# Altium PCB PAY-IF_R100.PcbDoc (part 5 of 5)
Units mm, origin at the board's own origin, x right, y up, seen from the top; angles counter-clockwise.
Board outline 93 x 90 mm, 6 copper layers (Top Layer, L2_GND, L3_PWR, L4_SIG, L5_GND, Bottom Layer), stack 1.598 mm thick; 271 components, 237 nets, 1362 pads, 661 vias.
Unrouted connection lines stored in the file: 5.
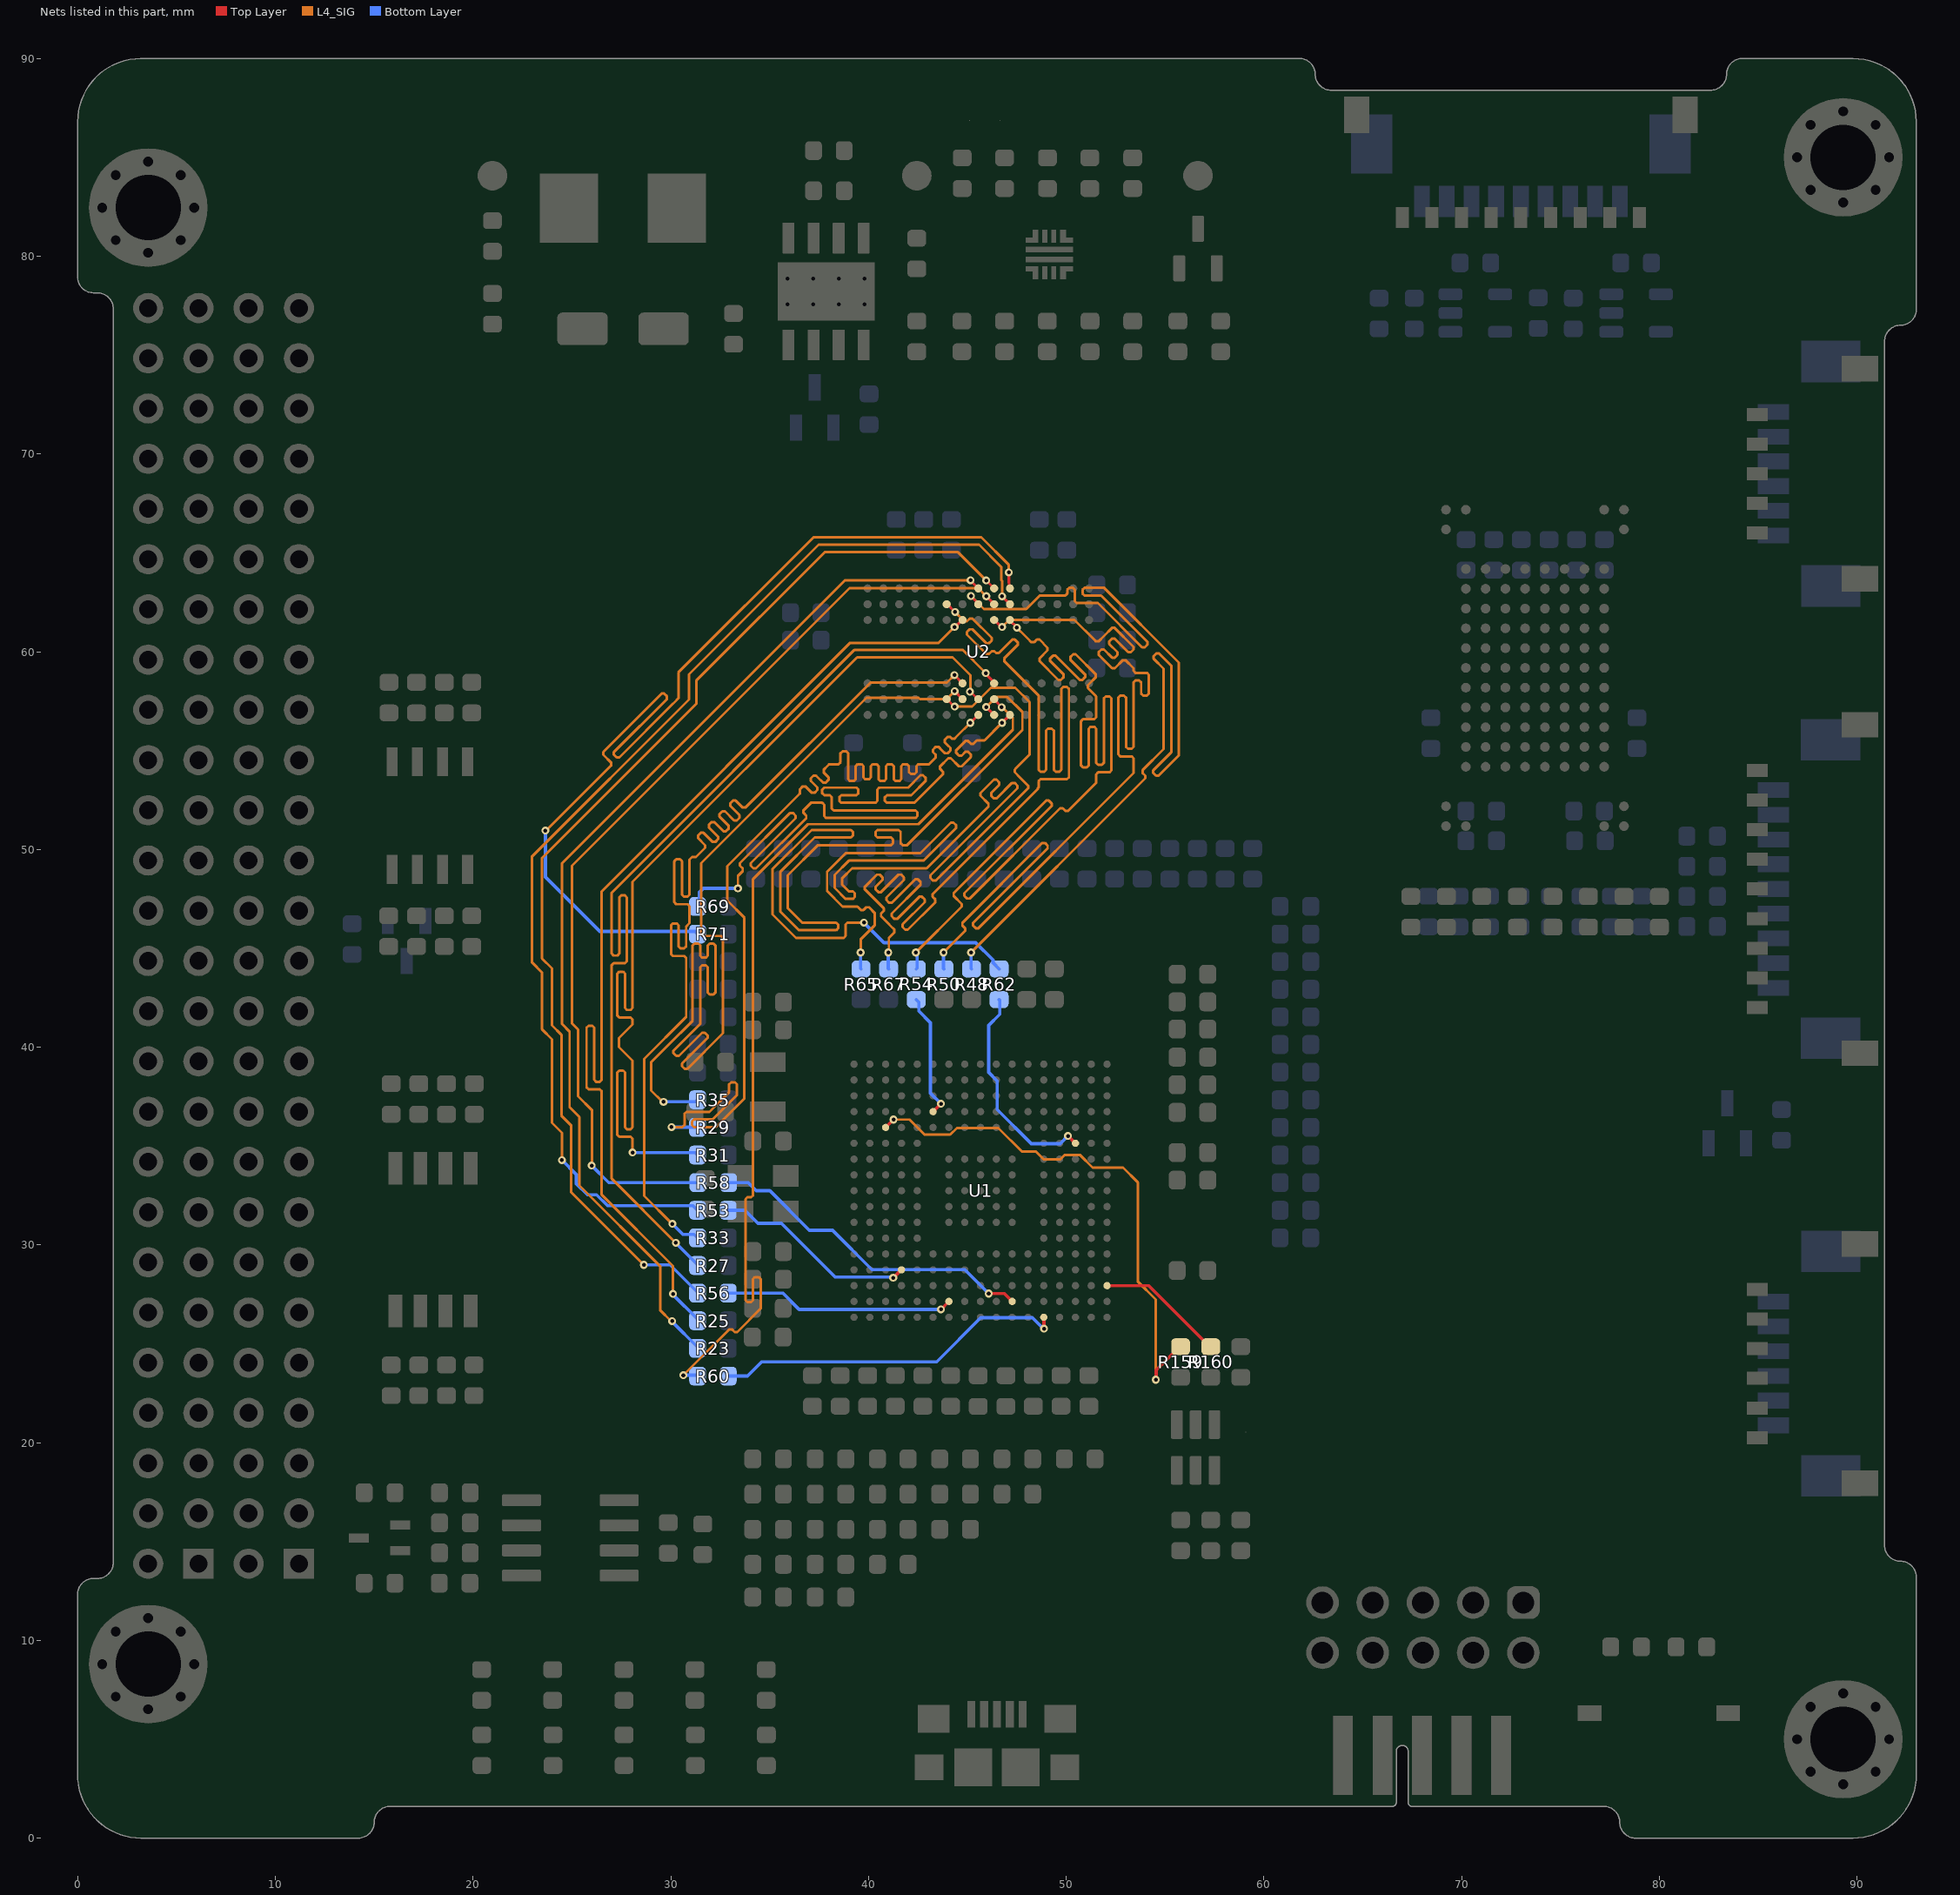
[diagram p9: the nets of this part, all layers, seen from the top]

## Via types
v1: diameter 0.4, hole 0.2, Top Layer to Bottom Layer, tented both sides, 661 vias

## Nets (pads, with @x,y where several pads share a name; then routed paths per layer and width w, separated by ;. In a path a pad name is that pad's centre, name@x,y a point inside that pad or via, vN(x,y) a via of type N, cw(c..) or ccw(c..) an arc to the next point about the centre after c; other vN are vias at no path point) (continued)
SDRAM_R_A5: R35.2 U2.G2 | length 56.7
  Top Layer w0.14: v1(44.357,58.002) U2.G2@44.757,57.601
  L4_SIG w0.13: v1(29.637,37.238) 29.577,37.238 29.014,37.8 29.014,39.245 29.645,39.876 29.759,39.99 29.827,40.058 31.106,41.337 31.106,45.147 31.202,45.243 31.394,45.243 31.49,45.147 31.49,44.62 31.586,44.524 31.778,44.524 31.874,44.62 31.874,45.144 31.97,45.24 32.162,45.24 32.258,45.144 32.258,42.759 32.162,42.663 31.97,42.663 31.874,42.759 31.874,44.044 31.778,44.14 31.586,44.14 31.49,44.044 31.49,41.178 30.14,39.828 30.14,39.692 30.276,39.556 30.411,39.556 31.588,40.733 31.724,40.733 31.86,40.597 31.86,40.461 30.573,39.175 30.573,39.039 30.709,38.904 30.845,38.904 32.642,40.701 32.642,45.528 32.546,45.624 31.638,45.624 31.542,45.72 31.542,45.785 31.542,49.306 39.9,57.664 42.543,57.664 42.604,57.603 43.958,57.603 v1(44.357,58.002)
  Bottom Layer w0.165: v1(29.637,37.238) 31.256,37.238 R35.2@31.356,37.338
SDRAM_R_A6: R33.2 U2.G3 | length 53.6
  Top Layer w0.14: v1(44.352,58.821) 44.352,58.814 44.757,58.409 U2.G3@44.757,58.401
  L4_SIG w0.13: v1(30.08,31.063) 28.661,32.482 28.661,39.41 30.78,41.529 30.78,44.45 30.78,44.515 30.684,44.611 30.108,44.611 30.012,44.707 30.012,46.163 30.108,46.259 30.3,46.259 30.396,46.163 30.396,45.091 30.492,44.995 30.684,44.995 30.78,45.091 30.78,46.099 30.95,46.27 30.95,47.132 30.854,47.228 30.278,47.228 30.182,47.324 30.182,49.405 30.278,49.501 30.47,49.501 30.566,49.405 30.566,47.708 30.662,47.612 30.854,47.612 30.95,47.708 30.95,49.485 31.081,49.616 31.276,49.616 31.36,49.7 31.694,50.033 31.739,50.079 31.739,50.215 31.386,50.569 31.386,50.705 31.521,50.84 31.657,50.84 32.119,50.379 32.254,50.379 32.39,50.515 32.39,50.651 31.929,51.112 31.929,51.248 32.064,51.383 32.2,51.383 32.662,50.922 32.797,50.922 32.933,51.058 32.933,51.194 32.472,51.655 32.472,51.791 32.608,51.927 32.743,51.927 33.205,51.465 33.34,51.465 33.476,51.601 33.476,51.737 33.015,52.198 33.015,52.334 33.151,52.47 33.286,52.47 33.64,52.116 33.776,52.116 33.993,52.333 40.104,58.444 43.975,58.444 v1(44.352,58.821)
  Bottom Layer w0.165: v1(30.08,31.063) 30.612,30.531 31.178,30.531 R33.2@31.356,30.353
SDRAM_R_A7: R31.2 U2.H2 | length 53.4
  Top Layer w0.14: v1(45.131,57.977) 45.156,57.977 45.531,57.601 U2.H2@45.557,57.601
  L4_SIG w0.13: v1(28.067,34.671) 28.067,35.306 28.067,35.371 27.971,35.467 27.395,35.467 27.299,35.563 27.299,38.722 27.395,38.818 27.587,38.818 27.683,38.722 27.683,35.947 27.779,35.851 27.971,35.851 28.067,35.947 28.067,38.883 28.067,39.314 27.383,39.998 27.383,40.466 28.067,41.151 28.067,41.337 28.067,41.402 27.971,41.498 27.395,41.498 27.299,41.594 27.299,43.722 27.395,43.818 27.587,43.818 27.683,43.722 27.683,41.978 27.779,41.882 27.971,41.882 28.067,41.978 28.067,43.979 28.067,48.357 39.428,59.718 44.252,59.718 45.156,58.814 45.156,58.003 v1(45.131,57.977)
  Bottom Layer w0.165: v1(28.067,34.671) 31.229,34.671 R31.2@31.356,34.544
SDRAM_R_A8: R29.2 U2.H1 | length 52.3
  Top Layer w0.13: v1@45.255,56.501 45.555,56.801 U2.H1@45.557,56.801
  Top Layer w0.164: v1(45.156,56.402) v1@45.255,56.501
  L4_SIG w0.13: v1(30.035,35.958) 30.533,35.958 30.598,35.958 30.694,36.054 30.694,36.63 30.79,36.726 31.957,36.726 32.957,37.726 32.957,38.128 33.053,38.224 33.245,38.224 33.341,38.128 33.341,37.567 32.116,36.342 31.174,36.342 31.078,36.246 31.078,36.054 31.174,35.958 32.275,35.958 33.725,37.408 33.725,38.289 33.725,46.543 32.854,47.414 32.854,49.151 36.444,52.742 36.54,52.837 36.54,52.918 36.54,53.053 36.676,53.189 36.812,53.189 36.852,53.149 37.138,52.863 37.273,52.863 37.409,52.999 37.409,53.135 37.123,53.421 37.083,53.461 37.083,53.596 37.219,53.732 37.355,53.732 37.395,53.692 37.706,53.381 37.842,53.381 37.978,53.516 37.978,53.652 37.734,53.896 37.734,54.032 37.938,54.235 38.013,54.311 38.205,54.311 38.493,54.311 38.589,54.407 38.589,54.866 38.685,54.962 38.877,54.962 38.973,54.866 38.973,54.311 38.973,53.554 39.069,53.458 39.261,53.458 39.357,53.554 39.357,54.215 39.453,54.311 39.645,54.311 39.741,54.215 39.741,53.643 39.837,53.547 40.029,53.547 40.125,53.643 40.125,54.215 40.221,54.311 40.413,54.311 40.509,54.215 40.509,53.554 40.605,53.458 40.797,53.458 40.893,53.554 40.893,54.215 40.989,54.311 41.181,54.311 41.277,54.215 41.277,53.554 41.373,53.458 41.565,53.458 41.661,53.554 41.661,54.215 41.757,54.311 41.949,54.311 42.045,54.215 42.045,53.909 42.141,53.813 42.333,53.813 42.429,53.909 42.429,54.215 42.525,54.311 42.813,54.311 43.064,54.311 43.2,54.446 43.404,54.65 43.404,54.786 43.271,54.919 43.271,55.055 43.406,55.191 43.542,55.191 43.743,54.99 43.869,54.864 44.005,54.864 44.141,54.999 44.141,55.135 44.015,55.261 43.863,55.413 43.863,55.549 43.999,55.684 44.134,55.684 44.218,55.6 44.354,55.6 44.482,55.728 v1(45.156,56.402)
  Bottom Layer w0.165: v1(30.035,35.958) 31.339,35.958 R29.2@31.356,35.941
SDRAM_R_A9: R27.2 U2.J3 | length 53.1
  Top Layer w0.14: v1(45.934,58.921) 45.934,58.873 46.357,58.45 U2.J3@46.357,58.401
  L4_SIG w0.13: v1(30.255,30.107) 27.013,33.349 27.013,44.087 27.013,44.152 27.109,44.248 27.685,44.248 27.781,44.344 27.781,47.576 27.685,47.672 27.493,47.672 27.397,47.576 27.397,44.728 27.301,44.632 27.109,44.632 27.013,44.728 27.013,47.737 27.013,47.813 39.298,60.098 44.756,60.098 v1(45.934,58.921)
  Bottom Layer w0.165: v1(30.255,30.107) 31.356,29.006 R27.2@31.356,28.956
SDRAM_R_A10: R25.2 U2.G7 | length 54.5
  Top Layer w0.14: v1(44.356,61.25) 44.38,61.25 44.732,61.601 U2.G7@44.757,61.601
  L4_SIG w0.13: v1(30.115,27.52) 30.115,28.932 26.509,32.537 26.509,37.706 26.509,37.771 26.413,37.867 25.837,37.867 25.741,37.963 25.741,40.99 25.837,41.086 26.029,41.086 26.125,40.99 26.125,38.347 26.221,38.251 26.413,38.251 26.509,38.347 26.509,41.151 26.509,47.884 39.072,60.447 43.553,60.447 v1(44.356,61.25)
  Bottom Layer w0.165: v1(30.115,27.52) 30.115,27.487 31.356,26.245 R25.2@31.356,26.162
SDRAM_R_A11: R23.2 U2.H9 | length 54.6
  Top Layer w0.14: v1@45.258,63.5 U2.H9@45.557,63.201 ; U2.H9@45.552,63.197 U2.H9@45.552,63.201
  Top Layer w0.164: v1(45.166,63.613) 45.166,63.592 v1@45.258,63.5
  L4_SIG w0.13: v1(30.068,26.144) 30.019,26.144 29.464,26.699 29.464,28.923 25.382,33.005 25.382,36.465 24.883,36.964 24.883,40.785 24.494,41.175 24.494,49.297 38.8,63.603 45.156,63.603 v1(45.166,63.613)
  Bottom Layer w0.165: v1(30.068,26.144) 30.068,26.124 31.356,24.835 R23.2@31.356,24.765
SDRAM_R_BA0: R50.2 U2.J7 | length 55.4
  Top Layer w0.14: U2.J7@46.357,61.601 46.381,61.601 46.732,61.25 v1(46.756,61.25)
  L4_SIG w0.13: v1(43.795,44.788) 44.841,45.834 44.887,45.88 44.887,46.016 44.752,46.152 44.752,46.288 48.791,50.327 48.926,50.327 49.062,50.191 49.062,50.055 45.295,46.288 45.295,46.152 45.431,46.016 45.566,46.016 53.408,53.858 53.408,54.612 53.312,54.708 52.736,54.708 52.64,54.804 52.64,57.684 52.736,57.78 52.928,57.78 53.024,57.684 53.024,55.188 53.12,55.092 53.312,55.092 53.408,55.188 53.408,58.452 53.504,58.548 53.696,58.548 53.792,58.452 53.792,57.876 53.888,57.78 54.08,57.78 54.176,57.876 54.176,58.836 54.08,58.932 53.504,58.932 53.408,59.028 53.408,59.161 53.002,59.567 52.866,59.567 52.459,59.16 52.323,59.16 51.639,59.844 51.639,59.98 51.775,60.116 51.91,60.116 52.323,59.703 52.459,59.703 52.595,59.839 52.595,59.974 52.182,60.387 52.182,60.523 52.318,60.659 52.453,60.659 53.138,59.974 53.274,59.974 53.409,60.11 53.409,60.246 52.453,61.202 52.318,61.202 51.91,60.795 51.639,60.523 51.503,60.523 51.457,60.569 50.415,61.611 47.118,61.611 v1(46.756,61.25)
  Bottom Layer w0.165: v1(43.795,44.788) 43.795,43.975 R50.2@43.815,43.955
SDRAM_R_BA1: R48.2 U2.H8 | length 56.7
  Top Layer w0.14: v1(45.183,62.817) 45.183,62.796 45.557,62.423 U2.H8@45.557,62.401
  L4_SIG w0.13: v1(45.183,62.817) 45.187,62.817 45.845,62.159 47.982,62.159 48.667,62.844 49.897,62.844 49.962,62.844 50.058,62.94 50.058,63.132 50.154,63.228 50.346,63.228 50.442,63.132 50.442,62.556 50.538,62.46 51.607,62.46 53.842,60.225 53.978,60.225 54.114,60.361 54.114,60.496 51.766,62.844 50.922,62.844 50.826,62.94 50.826,63.132 50.922,63.228 51.926,63.228 55.697,59.457 55.697,54.75 54.678,53.732 54.543,53.732 54.407,53.868 54.407,54.004 55.313,54.909 55.313,59.298 54.699,59.911 54.563,59.911 54.427,59.776 54.427,59.64 54.929,59.139 54.929,55.068 53.864,54.004 53.864,53.868 54,53.732 54,53.596 53.954,53.55 v1@45.193,44.79
  Bottom Layer w0.165: v1(45.191,44.788) 45.191,43.976 R48.2@45.212,43.955
SDRAM_R_NBL0: R71.2 U2.K9 | length 52.6
  Top Layer w0.14: 47.11,63.5 47.11,63.248 U2.K9@47.157,63.201
  Top Layer w0.165: v1(47.101,64.014) 47.109,64.006 47.109,63.566 ; 47.11,63.5 47.11,63.565
  L4_SIG w0.13: v1(23.66,50.953) 23.696,50.953 26.945,54.202 26.991,54.248 26.991,54.384 26.584,54.791 26.584,54.927 29.536,57.879 29.672,57.879 29.808,57.743 29.808,57.608 27.127,54.927 27.127,54.791 27.262,54.655 27.398,54.655 30.079,57.336 30.193,57.45 30.387,57.644 30.387,58.953 37.226,65.792 45.704,65.792 47.088,64.409 47.088,64.027 v1(47.101,64.014)
  Bottom Layer w0.165: v1(23.66,50.953) 23.66,48.603 26.413,45.85 31.226,45.85 R71.2@31.356,45.72
SDRAM_R_NBL1: R69.2 U2.K1 | length 50.9
  Top Layer w0.165: v1(46.756,56.402) U2.K1@47.157,56.801
  L4_SIG w0.128: v1(33.397,48.028) 33.397,48.661 33.593,48.858 33.638,48.903 33.638,49.038 33.503,49.173 33.503,49.308 36.041,51.846 36.176,51.846 36.311,51.711 36.311,51.576 34.044,49.308 34.044,49.173 34.179,49.038 34.314,49.038 36.851,51.576 36.851,51.711 36.716,51.846 36.716,51.981 36.761,52.026 37.093,52.358
  L4_SIG w0.13: 37.093,52.358 37.599,52.358 37.664,52.358 37.76,52.262 37.76,51.686 37.856,51.59 42.383,51.59 42.479,51.686 42.479,51.878 42.383,51.974 38.24,51.974 38.144,52.07 38.144,52.646 38.048,52.742 37.76,52.742 37.664,52.838 37.664,53.03 37.76,53.126 39.393,53.126 39.489,53.03 39.489,52.838 39.393,52.742 38.624,52.742 38.528,52.646 38.528,52.454 38.624,52.358 40.352,52.358 40.448,52.454 40.448,53.03 40.544,53.126 42.007,53.126 42.63,53.749 42.765,53.749 42.901,53.613 42.901,53.477 42.166,52.742 40.928,52.742 40.832,52.646 40.832,52.454 40.928,52.358 42.325,52.358 43.763,53.796 43.763,53.932 43.627,54.067 43.627,54.203 44.034,54.61 44.17,54.61 44.577,54.203 44.713,54.203 45.177,54.667 45.177,54.803 45.041,54.938 44.905,54.938 44.713,54.746 44.577,54.746 44.442,54.882 44.442,55.018 44.905,55.481 45.041,55.481 45.177,55.346 45.313,55.346 45.359,55.392 45.481,55.514 45.868,55.514 v1(46.756,56.402)
  Bottom Layer w0.165: R69.2@31.356,47.117 31.455,47.216 31.455,47.838 31.645,48.028 v1(33.397,48.028)
SDRAM_R_NBL2: R67.2 U2.F8 | length 61.7
  Top Layer w0.14: U2.F8@43.957,62.401 43.973,62.401 44.364,62.01 v1(44.38,62.01)
  L4_SIG w0.13: v1(41.001,44.788) 41.033,44.82 41.033,45.524 41.269,45.759 41.315,45.805 41.315,45.941 41.111,46.145 41.043,46.212 40.636,46.62 40.636,46.755 40.771,46.891 40.771,47.027 39.821,47.977 39.821,48.113 40.432,48.724 40.568,48.724 40.704,48.589 40.704,48.453 40.364,48.113 40.364,47.977 40.5,47.842 40.636,47.842 41.519,48.724 41.654,48.724 41.79,48.589 41.79,48.453 40.907,47.57 40.907,47.434 41.043,47.299 41.179,47.299 42.367,48.487 42.503,48.487 42.639,48.351 42.639,48.215 41.179,46.755 41.179,46.62 41.315,46.484 41.45,46.484 42.571,47.604 42.706,47.604 42.842,47.469 42.842,47.333 41.722,46.212 41.722,46.077 41.858,45.941 41.993,45.941 43.385,47.333 43.385,47.469 43.249,47.604 43.249,47.74 43.295,47.786 48.569,53.06 48.569,53.103 48.604,53.138 48.604,53.389 48.604,53.454 48.7,53.55 50.044,53.55 50.14,53.646 50.14,58.122 50.044,58.218 49.852,58.218 49.756,58.122 49.756,54.03 49.66,53.934 49.468,53.934 49.372,54.03 49.372,56.015 49.276,56.111 49.084,56.111 48.988,56.015 48.988,54.03 48.892,53.934 48.7,53.934 48.604,54.03 48.604,57.786 46.868,59.523 46.868,59.659 47.547,60.337 47.547,60.473 47.411,60.609 47.275,60.609 46.868,60.202 46.596,59.93 46.461,59.93 46.415,59.976 46.369,60.022 46.233,60.022 46.097,59.886 45.961,59.886 44.984,60.863 44.984,60.999 45.12,61.135 45.256,61.135 45.961,60.429 46.097,60.429 46.233,60.565 46.233,60.701 45.256,61.678 45.12,61.678 44.984,61.542 44.849,61.542 44.803,61.588 v1(44.38,62.01)
  Bottom Layer w0.165: v1(41.001,44.788) 41.001,43.975 R67.2@41.021,43.955
SDRAM_R_NBL3: R65.2 U2.F2 | length 62.3
  Top Layer w0.14: U2.F2@43.957,57.601 43.969,57.601 44.345,57.225 v1(44.357,57.225)
  L4_SIG w0.13: v1(39.604,44.788) 39.604,45.45 40.308,46.155 40.308,46.794 40.072,47.03 40.026,47.076 39.891,47.076 39.755,46.94 39.619,46.94 39.445,47.114 38.689,47.114 37.908,47.895 37.908,48.871 38.853,49.815 42.627,49.815 44.169,51.358 44.305,51.358 44.441,51.222 44.441,51.087 42.786,49.431 39.012,49.431 38.292,48.712 38.292,48.054 38.848,47.498 39.214,47.498 39.31,47.594 39.31,47.786 39.214,47.882 39.007,47.882 38.676,48.213 38.676,48.552 39.171,49.047 42.945,49.047 46.07,52.173 46.07,52.308 45.663,52.716 45.663,52.851 46.342,53.53 46.477,53.53 46.613,53.395 46.613,53.259 46.206,52.851 46.206,52.716 46.342,52.58 46.477,52.58 47.262,53.364 47.397,53.364 47.533,53.228 47.533,53.093 43.131,48.691 43.131,48.555 43.267,48.419 43.403,48.419 48.076,53.093 48.076,53.228 47.669,53.636 47.397,53.907 47.397,54.043 47.443,54.089 48.147,54.793 48.147,57.455 47.43,58.173 46.197,58.173 45.249,57.225 v1(44.357,57.225)
  Bottom Layer w0.165: v1(39.604,44.788) 39.604,43.975 R65.2@39.624,43.955
SDRAM_R_SDCKE1: R60.2 U2.J2 | length 49.5
  Top Layer w0.14: U2.J2@46.357,57.601 46.357,57.584 46.735,57.206 v1(46.735,57.189)
  L4_SIG w0.13: v1(30.637,23.408) 32.913,25.684 32.959,25.73 33.095,25.73 33.231,25.595 33.367,25.595 34.547,26.775 34.547,28.277 34.451,28.373 34.259,28.373 34.163,28.277 34.163,27.201 34.067,27.105 33.875,27.105 33.779,27.201 33.779,32.311 33.875,32.407 34.067,32.407 34.163,32.503 34.163,32.568 34.163,48.501 36.939,51.277 42.527,51.277 47.303,56.054 47.303,56.658 46.773,57.189 v1(46.735,57.189)
  Bottom Layer w0.165: v1(30.637,23.408) 31.314,23.408 R60.2@31.358,23.364
SDRAM_R_SDCLK: R62.2 U2.J1 | length 57.3
  Top Layer w0.14: v1(45.956,57.205) 45.956,57.203 U2.J1@46.357,56.801 U2.J1@46.357,56.801
  L4_SIG w0.13: v1(39.772,46.296) 39.007,46.296 38.942,46.296 38.846,46.2 38.846,45.624 38.75,45.528 36.336,45.528 35.152,46.712 35.152,49.011 37.127,50.986 39.114,50.986 39.21,50.89 39.21,50.698 39.114,50.602 37.286,50.602 35.536,48.852 35.536,46.871 36.495,45.912 38.366,45.912 38.462,46.008 38.462,46.2 38.366,46.296 36.654,46.296 35.92,47.03 35.92,48.693 37.445,50.218 41.146,50.218 41.242,50.314 41.242,50.506 41.146,50.602 40.458,50.602 40.362,50.698 40.362,50.89 40.458,50.986 41.53,50.986 41.626,50.89 41.626,50.314 41.722,50.218 41.787,50.218 41.959,50.218 47.786,56.045 47.786,56.952 47.022,57.717 46.468,57.717 v1(45.956,57.205)
  Bottom Layer w0.165: v1(39.772,46.296) 39.772,46.295 40.786,45.281 45.428,45.281 46.298,44.411 46.298,44.266 R62.2@46.609,43.955
SDRAM_R_SDNCAS: R54.2 U2.K7 | length 58.8
  Top Layer w0.14: U2.K7@47.157,61.601 47.157,61.582 47.503,61.236 v1(47.503,61.216)
  L4_SIG w0.13: v1(42.398,44.788) 44.673,47.063 44.719,47.109 44.719,47.244 44.311,47.652 44.311,47.787 48.991,52.467 49.127,52.467 49.263,52.332 49.263,52.196 44.855,47.787 44.855,47.652 44.99,47.516 45.126,47.516 49.535,51.924 49.648,52.038 49.694,52.084 49.83,52.084 49.966,51.948 50.102,51.948 51.521,53.368 51.521,53.802 51.617,53.898 52.193,53.898 52.289,53.994 52.289,57.642 52.193,57.738 52.001,57.738 51.905,57.642 51.905,54.378 51.809,54.282 51.617,54.282 51.521,54.378 51.521,56.106 51.425,56.202 51.233,56.202 51.137,56.106 51.137,54.243 51.041,54.147 50.849,54.147 50.753,54.243 50.753,56.49 50.849,56.586 51.425,56.586 51.521,56.682 51.521,57.741 51.094,58.168 51.094,58.304 51.502,58.711 51.502,58.847 50.483,59.865 50.348,59.865 50.212,59.729 50.212,59.593 50.959,58.847 50.959,58.711 50.823,58.575 50.687,58.575 49.465,59.797 49.329,59.797 49.194,59.661 49.194,59.526 49.872,58.847 49.872,58.711 49.737,58.575 49.601,58.575 48.651,59.526 48.651,59.661 49.058,60.069 49.058,60.204 48.651,60.612 48.515,60.612 48.379,60.476 48.243,60.476 48.04,60.68 47.972,60.747 47.926,60.793 v1(47.503,61.216)
  Bottom Layer w0.165: v1(42.398,44.788) 42.398,44.739 42.465,44.672 42.465,44.002 R54.2@42.418,43.955
SDRAM_R_SDNE1: R58.2 U2.J8 | length 48.8
  Top Layer w0.14: v1(45.961,62.806) 45.961,62.801 46.357,62.406 U2.J8@46.357,62.401
  L4_SIG w0.13: v1(26.001,34.015) 26.009,34.023 26.009,36.823 25.311,37.521 25.311,40.888 25.003,41.197 25.003,49.171 39.039,63.207 45.552,63.207 45.953,62.806 v1(45.961,62.806)
  Bottom Layer w0.165: v1(26.001,34.015) 26.868,33.147 R58.2@31.376,33.147
SDRAM_R_SDNRAS: R56.2 U2.J9 | length 56.8
  Top Layer w0.13: v1@46.058,63.5 U2.J9@46.357,63.201
  Top Layer w0.164: v1(45.957,63.602) v1@46.058,63.5
  L4_SIG w0.13: v1(28.64,28.991) 24.952,32.679 24.952,36.057 24.468,36.542 24.468,40.627 23.99,41.105 23.99,43.979 23.486,44.483 23.486,49.56 31.289,57.363 31.289,58.535 37.785,65.03 38.628,65.03 44.528,65.03 v1(45.957,63.602)
  Bottom Layer w0.165: v1(28.64,28.991) 29.967,28.991 31.356,27.602 R56.2@31.356,27.559
SDRAM_R_SDNWE: R53.2 U2.K8 | length 57.7
  Top Layer w0.14: v1(46.757,62.802) U2.K8@47.157,62.401
  L4_SIG w0.13: v1(24.494,34.29) 24.494,35.669 23.99,36.173 23.99,40.401 23.495,40.897 23.495,43.77 22.987,44.278 22.987,49.65 30.919,57.582 30.919,58.856 37.474,65.411 45.592,65.411 46.711,64.293 46.711,63.633 46.757,63.587 v1(46.757,62.802)
  Bottom Layer w0.165: v1(24.494,34.29) 25.223,33.561 25.223,33.098 25.787,32.534 26.25,32.534 26.804,31.98 31.126,31.98 R53.2@31.356,31.75
SDRAM_SDCKE1: R60.1 U1.U13 | length 18
  Top Layer w0.165: U1.U13@48.869,26.339 48.873,26.335 48.873,25.768 v1(48.878,25.764)
  Bottom Layer w0.165: R60.1@32.908,23.364 33.88,23.364 34.601,24.085 43.449,24.085 45.679,26.315 48.296,26.315 48.846,25.764 v1(48.878,25.764)
SDRAM_SDCLK: R62.1 U1.F15 | length 11
  Top Layer w0.165: v1(50.093,35.51) 50.096,35.51 50.466,35.139 U1.F15@50.469,35.139
  Bottom Layer w0.165: R62.1@46.609,42.405 46.641,42.373 46.641,41.662 46.082,41.104 46.082,38.72 46.513,38.289 46.513,36.842 48.238,35.116 49.698,35.116 50.092,35.51 v1(50.093,35.51)
SDRAM_SDNCAS: R54.1 U1.D6 | length 6.3
  Top Layer w0.165: U1.D6@43.269,36.739 v1(43.669,37.139)
  Bottom Layer w0.165: R54.1@42.418,42.405 42.55,42.273 42.55,41.825 43.135,41.24 43.135,37.673 v1(43.669,37.139)
SDRAM_SDNE1: R58.1 U1.T11 | length 16.8
  Top Layer w0.165: v1(46.081,27.539) 46.869,27.539 U1.T11@47.269,27.139
  Bottom Layer w0.164: 40.172,28.751 41.088,28.751 41.09,28.749 43.82,28.749 43.822,28.751 44.869,28.751
  Bottom Layer w0.165: R58.1@32.926,33.147 33.913,33.147 34.322,32.738 35.009,32.738 37.008,30.739 38.184,30.739 40.172,28.751 ; 44.869,28.751 v1(46.081,27.539)
SDRAM_SDNRAS: R56.1 U1.T7 | length 11.7
  Top Layer w0.165: v1(43.669,26.739) U1.T7@44.069,27.139
  Bottom Layer w0.165: R56.1@32.906,27.559 35.675,27.559 36.495,26.739 v1(43.669,26.739)
SDRAM_SDNWE: R53.1 U1.P4 | length 10.3
  Top Layer w0.165: v1(41.251,28.336) 41.258,28.336 41.662,28.739 U1.P4@41.669,28.739
  Bottom Layer w0.165: R53.1@32.906,31.75 33.746,31.75 34.407,31.089 35.601,31.089 38.316,28.374 41.213,28.374 v1(41.251,28.336)
WAKEUP: R159.2 U1.E3 | length 27.3
  Top Layer w0.165: U1.E3@40.869,35.939 v1(41.269,36.339) ; v1(54.536,23.183) 54.554,23.201 54.554,23.669 55.737,24.852 R159.2@55.787,24.852
  L4_SIG w0.13: v1(41.269,36.339) 42.075,36.339 42.837,35.578 44.133,35.578 44.47,35.915 46.571,35.915 47.765,34.721 48.469,34.721 48.871,34.319 49.693,34.319 49.911,34.537 50.716,34.537 51.34,33.913 52.876,33.913 53.62,33.169 53.62,28.152 54.536,27.236 v1(54.536,23.183)
WD_DONE: R160.2 U1.R17 | length 6.5
  Top Layer w0.165: U1.R17@52.069,27.939 54.169,27.939 57.256,24.852 R160.2@57.311,24.852
pads on no net: H1.02 H1.04 H1.05 H1.06 H1.07 H1.08 H1.09 H1.10 H1.11 H1.12 H1.13 H1.14 H1.15 H1.16 H1.17 H1.18 H1.19 H1.20 H1.21 H1.22 H1.23 H1.24 H1.25 H1.26 H1.27 H1.28 H1.29 H1.30 H1.31 H1.32 H1.33 H1.34 H1.35 H1.36 H1.37 H1.38 H1.39 H1.40 H1.42 H1.44 H1.45 H1.46 H1.47 H1.48 H1.49 H1.50 H1.51 H1.52 H2.01 H2.02 H2.03 H2.04 H2.05 H2.06 H2.07 H2.08 H2.09 H2.10 H2.11 H2.12 H2.13 H2.14 H2.15 H2.16 H2.17 H2.18 H2.19 H2.20 H2.21 H2.22 H2.23 H2.24 H2.25 H2.26 H2.27 H2.28 H2.33 H2.34 H2.35 H2.36 H2.37 H2.38 H2.39 H2.40 H2.41 H2.42 H2.43 H2.44 H2.45 H2.46 H2.49 H2.50 H2.51 H2.52 J1.3 J1B.4 J4.4 J4B.3 J5.1 J5BK.10 J6.4 U1.A5 U1.A8 U1.A9 U1.A10 U1.A11 U1.B5 U1.B7 U1.B8 U1.B10 U1.B11 U1.C3 U1.C5 U1.C7 U1.C8 U1.C9 U1.D1 U1.D2 U1.D3 U1.D7 U1.D8 U1.D9 U1.D10 U1.D11 U1.D14 U1.D15 U1.E1 U1.E4 U1.E5 U1.E10 U1.E15 U1.F4 U1.F16 U1.H1 U1.H2 U1.H3 U1.H15 U1.H16 U1.H17 U1.J14 U1.J15 U1.K14 U1.K16 U1.K17 U1.L2 U1.L14 U1.L16 U1.L17 U1.M4 U1.M14 U1.M16 U1.M17 U1.N2 U1.N3 U1.N6 U1.N13 U1.N14 U1.N15 U1.N17 U1.P2 U1.P3 U1.P5 U1.P6 U1.P11 U1.P12 U1.R1 U1.R2 U1.R5 U1.R6 U1.R12 U1.R15 U1.R16 U1.T3 U1.T5 U1.T6 U1.U4 U1.U5 U1.U6 U1.U7 U2.E3 U2.E7 U2.H3 U2.H7 U2.K2 U2.K3 U3.A1 U3.A2 U3.A9 U3.A10 U3.B1 U3.B10 U3.D2 U3.D3 U3.D4 U3.D5 U3.D6 U3.D7 U3.D8 U3.D9 U3.E2 U3.E3 U3.E4@72.215,63.181 U3.E5 U3.E6 U3.E7 U3.E8 U3.E9 U3.F2@70.215,62.181 U3.F3@71.215,62.181 U3.F4@72.215,62.181 U3.F5@73.215,62.181 U3.F6@74.215,62.181 U3.F7@75.215,62.181 U3.F8@76.215,62.181 U3.F9@77.215,62.181 U3.G2@70.215,61.181 U3.G3@71.215,61.181 U3.G4@72.215,61.181 U3.G5@73.215,61.181 U3.G6@74.215,61.181 U3.G7@75.215,61.181 U3.G8@76.215,61.181 U3.G9@77.215,61.181 U3.H2@70.215,60.181 U3.H3@71.215,60.181 U3.H4 U3.H5 U3.H6 U3.H7 U3.H8@76.215,60.181 U3.H9@77.215,60.181 U3.J2 U3.J3 U3.J4 U3.J5@73.215,59.181 U3.J6 U3.J7 U3.J8 U3.J9 U3.K2@70.215,58.181 U3.K3@71.215,58.181 U3.K4 U3.K5 U3.K6 U3.K7 U3.K8@76.215,58.181 U3.K9@77.215,58.181 U3.L2@70.215,57.181 U3.L3@71.215,57.181 U3.L4@72.215,57.181 U3.L5 U3.L6 U3.L7@75.215,57.181 U3.L8@76.215,57.181 U3.L9@77.215,57.181 U3.M2 U3.M3 U3.M4@72.215,56.181 U3.M5@73.215,56.181 U3.M6 U3.M7@75.215,56.181 U3.M8 U3.M9 U3.N2@70.215,55.181 U3.N3@71.215,55.181 U3.N4 U3.N5 U3.N6 U3.N7 U3.N8@76.215,55.181 U3.N9@77.215,55.181 U3.P2@70.215,54.181 U3.P3@71.215,54.181 U3.P4 U3.P5@73.215,54.181 U3.P6@74.215,54.181 U3.P7 U3.P8@76.215,54.181 U3.P9@77.215,54.181 U3.T1 U3.T10 U3.U1 U3.U2 U3.U9 U3.U10 U10.2 U10.3 U10.5

## Polygon pours and split planes (outlines as drawn)
3V3 on L3_PWR "3V3_L03" (solid, remove dead copper, pour order 33): 3.2,0 cw(c3.2,3.2) 0,3.2 0,12.33 cw(c0.8,12.33) 0.8,13.13 1,13.13 ccw(c1,13.93) 1.8,13.93 1.8,77.35 ccw(c1,77.35) 1,78.15 0.8,78.15 cw(c0.8,78.95) 0,78.95 0,86.8 cw(c3.2,86.8) 3.193,90 3.2,90 89.8,90 89.807,90 cw(c89.8,86.8) 93,86.807 93,77.307 cw(c92.2,77.307) 92.2,76.507 ccw(c92.2,75.707) 91.4,75.707 91.4,14.8 ccw(c92.2,14.8) 92.2,14 cw(c92.2,13.2) 93,13.2 93,3.2 cw(c89.8,3.2) 89.8,0 78.8,0 cw(c78.8,0.8) 78,0.8 ccw(c77.2,0.8) 77.2,1.6 67.5,1.6 cw(c67.5,1.8) 67.3,1.8 67.3,4.387 ccw(c67,4.387) 66.7,4.387 66.7,1.8 cw(c66.5,1.8) 66.5,1.6 51,1.6 15.8,1.6 ccw(c15.8,0.8) 15,0.8 cw(c14.2,0.8) 14.2,0
3V3 on L3_PWR "VDD_MCU_L03" (solid, pour order 24): 33.785,78.15 16.319,78.15 16.319,75.12 30.226,75.12 30.226,42.356 30.226,18.296 33.528,18.296 33.528,10.668 39.646,10.668 39.646,13.008 45.974,13.008 45.974,16.523 54.864,16.523 54.864,36.576 38.876,36.576 38.876,22.352 33.785,22.352
3V3 on L3_PWR "VDDLDO_MCU_L03" (solid, pour order 4): 16.383,81.28 16.382,79.818 36.703,79.818 36.703,39.37 48.514,39.37 50.546,37.338 50.546,25.759 47.752,25.759 47.752,25.002 51.435,25.002 51.435,37.361 53.467,37.361 53.467,37.973 51.435,37.973 49.022,40.386 48.133,41.275 38.1,41.275 38.1,81.28
MCU_VCAP on L3_PWR "VCAP_MCU_L03" (solid, remove dead copper, pour order 23): 43.328,41.275 48.294,41.275 51.608,37.96 53.467,37.973 53.467,37.401 51.435,37.401 51.435,25.002 47.907,25.002 47.907,25.909 47.219,25.909 47.219,24.153 52.51,24.153 52.51,34.73 52.51,36.616 54.864,36.616 54.864,38.862 52.006,38.862 48.45,42.418 43.328,42.418
3V3 on L3_PWR "VDD_SDRAM_L03" (solid, pour order 26): 16.383,82.677 16.383,81.28 38.1,81.28 38.1,54.61 51.562,54.61 51.562,64.643 41.402,64.643 41.402,82.677
3V3 on L3_PWR "VDD_eMMC_L03" (solid, pour order 28): 16.383,84.582 16.383,86.106 57.404,86.106 78.486,65.024 78.486,52.181 69.088,52.181 69.215,52.308 69.215,69.469 54.102,84.582
12V_CONN on L3_PWR "12V_CONN_L03" (solid, pour order 29): 89.154,68.326 89.154,41.275 86.487,41.275 86.487,68.326
GND on Top Layer "GND_L01" (solid, remove dead copper, pour order 38): 3.2,0 cw(c3.2,3.2) 0,3.2 0,12.33 cw(c0.8,12.33) 0.8,13.13 1,13.13 ccw(c1,13.93) 1.8,13.93 1.8,77.35 ccw(c1,77.35) 1,78.15 0.8,78.15 cw(c0.8,78.95) 0,78.95 0,86.8 cw(c3.2,86.8) 3.193,90 3.2,90 89.8,90 89.807,90 cw(c89.8,86.8) 93,86.807 93,77.307 cw(c92.2,77.307) 92.2,76.507 ccw(c92.2,75.707) 91.4,75.707 91.4,14.8 ccw(c92.2,14.8) 92.2,14 cw(c92.2,13.2) 93,13.2 93,3.2 cw(c89.8,3.2) 89.8,0 78.8,0 cw(c78.8,0.8) 78,0.8 ccw(c77.2,0.8) 77.2,1.6 67.5,1.6 cw(c67.5,1.8) 67.3,1.8 67.3,4.387 ccw(c67,4.387) 66.7,4.387 66.7,1.8 cw(c66.5,1.8) 66.5,1.6 51,1.6 15.8,1.6 ccw(c15.8,0.8) 15,0.8 cw(c14.2,0.8) 14.2,0
GND on Top Layer "GND_L01_P006" (solid, pour order 6): 50.092,81.047 50.096,81.453 49.496,81.454 49.496,80.69 49.246,80.69 49.246,82.113 50.191,83.058 52.93,83.058 50.894,81.047
12V_CONN on Top Layer "12V_CONN_L01_P010" (solid, remove dead copper, pour order 10): 45.873,87.884 61.468,87.869 61.468,85.725 88.925,85.725 88.9,65.151 83.818,65.151 83.822,68.348 86.106,68.348 86.106,78.994 82.6,83.01 61.468,83.009 61.468,79.612 47.949,79.688 47.949,80.685 45.873,80.685
12V on Top Layer "12V_EFULSE_L01" (solid, pour order 12): 36.221,79.628 50.597,79.686 50.597,80.486 47.81,80.486 47.825,83.947 45.873,83.947 45.873,87.884 36.221,87.884 36.221,81.788
NetC44_1 on Top Layer "DEBUCK_L01" (solid, remove dead copper, pour order 13): 36.221,87.884 27.912,87.884 27.912,74.742 36.221,74.759
3V3 on Top Layer "3V3_L01_P015" (solid, pour order 15): 27.912,87.884 16.383,87.884 16.383,74.727 27.965,74.727
12V_CONN on Top Layer "12V_CONN_L01_P011" (solid, pour order 11): 84.037,42.799 84.037,41.22 88.519,41.22 88.519,43.688 86.614,43.688 86.614,42.799
3V3 on Top Layer "3V3_L01_P032" (solid, remove dead copper, pour order 32): 47.483,20.269 50.785,20.269 50.785,18.288 49.165,18.288 49.165,16.383 47.483,16.383
3V3 on Top Layer "3V3_L01_P020" (solid, remove dead copper, pour order 20): 41.179,20.269 44.481,20.269 44.481,14.63 42.861,14.63 42.861,12.776 41.179,12.776
3V3 on Top Layer "3V3_L01_P018" (solid, remove dead copper, pour order 18): 34.874,20.269 38.176,20.269 38.176,11.125 34.874,11.125
GND on Bottom Layer "GND_L06" (solid, remove dead copper, pour order 40): 3.2,0 cw(c3.2,3.2) 0,3.2 0,12.33 cw(c0.8,12.33) 0.8,13.13 1,13.13 ccw(c1,13.93) 1.8,13.93 1.8,77.35 ccw(c1,77.35) 1,78.15 0.8,78.15 cw(c0.8,78.95) 0,78.95 0,86.8 cw(c3.2,86.8) 3.193,90 3.2,90 89.8,90 89.807,90 cw(c89.8,86.8) 93,86.807 93,77.307 cw(c92.2,77.307) 92.2,76.507 ccw(c92.2,75.707) 91.4,75.707 91.4,14.8 ccw(c92.2,14.8) 92.2,14 cw(c92.2,13.2) 93,13.2 93,3.2 cw(c89.8,3.2) 89.8,0 78.8,0 cw(c78.8,0.8) 78,0.8 ccw(c77.2,0.8) 77.2,1.6 67.5,1.6 cw(c67.5,1.8) 67.3,1.8 67.3,4.387 ccw(c67,4.387) 66.7,4.387 66.7,1.8 cw(c66.5,1.8) 66.5,1.6 51,1.6 15.8,1.6 ccw(c15.8,0.8) 15,0.8 cw(c14.2,0.8) 14.2,0
3V3 on Bottom Layer "3V3_L06_P022" (solid, pour order 22): 72.773,50.818 72.773,56.894 71.247,58.42 71.247,60.325 76.2,60.325 76.2,58.42 74.676,56.896 74.676,50.818 76.646,50.818 76.646,55.154 77.246,55.753 79.883,55.753 79.883,65.024 67.5,65.024 67.5,55.753 70.231,55.753 70.832,55.152 70.832,50.818
12V_CONN on Bottom Layer "12V_CONN_L06_P031" (solid, pour order 31): 84.328,67.877 88.514,67.877 88.514,65.024 84.328,65.024
12V_CONN on Bottom Layer "12V_CONN_L06_P030" (solid, pour order 30): 84.328,43.749 88.514,43.749 88.514,42.203 84.328,42.203
GND on L5_GND "GND_L05" (solid, remove dead copper, pour order 37): 3.2,0 cw(c3.2,3.2) 0,3.2 0,12.33 cw(c0.8,12.33) 0.8,13.13 1,13.13 ccw(c1,13.93) 1.8,13.93 1.8,77.35 ccw(c1,77.35) 1,78.15 0.8,78.15 cw(c0.8,78.95) 0,78.95 0,86.8 cw(c3.2,86.8) 3.193,90 3.2,90 89.8,90 89.807,90 cw(c89.8,86.8) 93,86.807 93,77.307 cw(c92.2,77.307) 92.2,76.507 ccw(c92.2,75.707) 91.4,75.707 91.4,14.8 ccw(c92.2,14.8) 92.2,14 cw(c92.2,13.2) 93,13.2 93,3.2 cw(c89.8,3.2) 89.8,0 78.8,0 cw(c78.8,0.8) 78,0.8 ccw(c77.2,0.8) 77.2,1.6 67.5,1.6 cw(c67.5,1.8) 67.3,1.8 67.3,4.387 ccw(c67,4.387) 66.7,4.387 66.7,1.8 cw(c66.5,1.8) 66.5,1.6 51,1.6 15.8,1.6 ccw(c15.8,0.8) 15,0.8 cw(c14.2,0.8) 14.2,0
GND on L4_SIG "GND_L04" (solid, remove dead copper, pour order 41): 0,3.2 0,12.33 cw(c0.8,12.33) 0.8,13.13 1,13.13 ccw(c1,13.93) 1.8,13.93 1.8,77.35 ccw(c1,77.35) 1,78.15 0.8,78.15 cw(c0.8,78.95) 0,78.95 0,86.8 cw(c3.2,86.8) 3.193,90 3.2,90 61.8,90 cw(c61.8,89.2) 62.6,89.2 ccw(c63.4,89.2) 63.4,88.4 82.6,88.4 ccw(c82.6,89.2) 83.4,89.2 cw(c84.2,89.2) 84.2,90 89.8,90 89.807,90 cw(c89.8,86.8) 93,86.807 93,77.307 cw(c92.2,77.307) 92.2,76.507 ccw(c92.2,75.707) 91.4,75.707 91.4,14.8 ccw(c92.2,14.8) 92.2,14 cw(c92.2,13.2) 93,13.2 93,3.2 cw(c89.8,3.2) 89.8,0 78.8,0 cw(c78.8,0.8) 78,0.8 ccw(c77.2,0.8) 77.2,1.6 67.5,1.6 cw(c67.5,1.8) 67.3,1.8 67.3,4.387 ccw(c67,4.387) 66.7,4.387 66.7,1.8 cw(c66.5,1.8) 66.5,1.6 51,1.6 15.8,1.6 ccw(c15.8,0.8) 15,0.8 cw(c14.2,0.8) 14.2,0 3.2,0 cw(c3.2,3.2)
GND on L2_GND "GND_L02" (solid, remove dead copper, pour order 42): 3.2,0 cw(c3.2,3.2) 0,3.2 0,12.33 cw(c0.8,12.33) 0.8,13.13 1,13.13 ccw(c1,13.93) 1.8,13.93 1.8,77.35 ccw(c1,77.35) 1,78.15 0.8,78.15 cw(c0.8,78.95) 0,78.95 0,86.8 cw(c3.2,86.8) 3.193,90 3.2,90 89.8,90 89.807,90 cw(c89.8,86.8) 93,86.807 93,77.307 cw(c92.2,77.307) 92.2,76.507 ccw(c92.2,75.707) 91.4,75.707 91.4,14.8 ccw(c92.2,14.8) 92.2,14 cw(c92.2,13.2) 93,13.2 93,3.2 cw(c89.8,3.2) 89.8,0 78.8,0 cw(c78.8,0.8) 78,0.8 ccw(c77.2,0.8) 77.2,1.6 67.5,1.6 cw(c67.5,1.8) 67.3,1.8 67.3,4.387 ccw(c67,4.387) 66.7,4.387 66.7,1.8 cw(c66.5,1.8) 66.5,1.6 51,1.6 15.8,1.6 ccw(c15.8,0.8) 15,0.8 cw(c14.2,0.8) 14.2,0

## Keep-outs
Keep-Out Layer:
  lines w0.1: 1.8,77.35 1.8,13.93 cw(c1,13.93) 1,13.13 0.8,13.13 ccw(c0.8,12.33) 0,12.33 0,3.2 ccw(c3.2,3.2) 3.2,0 14.2,0 ccw(c14.2,0.8) 15,0.8 cw(c15.8,0.8) 15.8,1.6 51,1.6 66.5,1.6 ccw(c66.5,1.8) 66.7,1.8 ; 1.8,77.35 ccw(c1,77.35) 1,78.15 0.8,78.15 cw(c0.8,78.95) 0,78.95 0,86.8 cw(c3.2,86.8) 3.193,90 ; 3.2,90 61.8,90 cw(c61.8,89.2) 62.6,89.2 ccw(c63.4,89.2) 63.4,88.4 82.6,88.4 ccw(c82.6,89.2) 83.4,89.2 cw(c84.2,89.2) 84.2,90 89.8,90 ; 67.3,1.8 ccw(c67.5,1.8) 67.5,1.6 77.2,1.6 cw(c77.2,0.8) 78,0.8 ccw(c78.8,0.8) 78.8,0 89.8,0 ccw(c89.8,3.2) 93,3.2 93,13.2 ccw(c92.2,13.2) 92.2,14 cw(c92.2,14.8) 91.4,14.8 91.4,75.707 cw(c92.2,75.707) 92.2,76.507 ccw(c92.2,77.307) 93,77.307 93,86.807 ccw(c89.8,86.8) 89.807,90

## Other copper
Top Layer:
  pour cut-out: 62.738,2.413 73.279,2.413 73.279,1.6 62.738,1.6
  pour cut-out: 45.466,87.343 46.397,87.343 46.397,86.393 45.467,86.393
  pour cut-out: 49.149,82.016 49.246,82.113 49.25,81.32 49.496,81.32 49.496,81.44 49.596,81.439 49.596,80.596 49.149,80.596
Bottom Layer:
  pour cut-out: 62.738,2.413 73.279,2.413 73.279,1.6 62.738,1.6

## Silkscreen, mask and mechanical layers (free items; w line width, h text height)
Top Overlay:
  drawing of 34 lines, arcs and shapes, not listed
  text "12V_e" at 41.689,86.121 h0.4 r45
  text "12V_IN" at 55.659,86.121 h0.4 r45
  text "3V3" at 20.527,86.073 h0.4 r45
  text "LVDS_RxC_N" at 67.208,76.033 h0.4 r90
  text "LVDS_RxC_P" at 68.75,76.033 h0.4 r90
  text "LVDS_TxC_N" at 70.158,76.033 h0.4 r90
  text "LVDS_TxC_P" at 71.633,76.033 h0.4 r90
  text "GND" at 73.191,75.987 h0.4 r90
  text "LVDS_RxD_N" at 74.733,75.987 h0.4 r90
  text "LVDS_RxD_P" at 76.274,75.987 h0.4 r90
  text "LVDS_TxD_N" at 77.683,75.987 h0.4 r90
  text "LVDS_TxD_P" at 79.157,75.987 h0.4 r90
  text "GND" at 81.654,71.809 h0.4
  text "GND" at 81.654,70.2 h0.4
  text "NC" at 81.654,68.659 h0.4
  text "12V" at 81.654,67.251 h0.4
  text "12V" at 81.654,65.776 h0.4
  text "ShDown" at 81.654,53.841 h0.4
  text "USB_N" at 81.654,52.3 h0.4
  text "USB_P" at 81.654,50.758 h0.4
  text "SDA" at 81.654,49.283 h0.4
  text "SCL" at 81.654,47.808 h0.4
  text "CAN_L" at 81.654,46.267 h0.4
  text "CAN_H" at 81.654,44.726 h0.4
  text "GND" at 81.654,43.251 h0.4
  text "12V" at 81.654,41.776 h0.4
  text "BEE-1006 PAY-IF R1.0.0" at 63.7,28.775 h0.8
  text "SCL2" at 81.654,27.425 h0.4
  text "Designed by: Sang Huynh" at 65.168,26.343 h0.6
  text "SCL2" at 81.654,25.952 h0.4
  text "Checked by: Bao Bui" at 66.561,24.565 h0.6
  text "NC" at 81.654,24.479 h0.4
  text "GND" at 81.654,23.005 h0.4
  text "Approved by: Vu Pham" at 66.034,22.787 h0.6
  text "SDA2" at 81.654,21.532 h0.4
  text "SDA2" at 81.654,20.059 h0.4
  text "12V_EFULSE" at 19.073,3.711 h0.5 r90
  text "3V3" at 22.754,3.711 h0.5 r90
  text "LED_1" at 26.268,3.711 h0.5 r90
  text "LED_2" at 29.866,3.711 h0.5 r90
  text "VBUS_USB" at 33.464,3.711 h0.5 r90
  text "RESET" at 78.803,2.939 h0.5
  text "NC" at 54.208,2.198 h0.5 r90
  text "JTDI" at 55.764,2.198 h0.5 r90
  text "JTMS/SWDIO" at 57.32,2.198 h0.5 r90
  text "JTCK/SWCLK" at 58.875,2.198 h0.5 r90
  text "JTDO/SWO" at 60.431,2.198 h0.5 r90
Bottom Overlay:
  drawing of 54 lines, arcs and shapes, not listed
  text "GND" at 82.684,71.975 h0.4
  text "GND" at 82.684,70.68 h0.4
  text "GND" at 82.684,69.384 h0.4
  text "NC" at 82.557,68.192 h0.4
  text "12V" at 82.684,66.794 h0.4
  text "12V" at 82.684,65.498 h0.4
  text "SCL1" at 82.81,61.519 h0.4
  text "SDA1" at 82.81,59.989 h0.4
  text "SDA2" at 82.81,58.458 h0.4
  text "SCL2" at 82.81,56.927 h0.4
  text "ShDown" at 77.724,37.084 h0.4
  text "USB_N" at 77.47,35.881 h0.4
  text "USB_P" at 77.47,34.611 h0.4
  text "SDA" at 77.089,33.274 h0.4
  text "SCL" at 77.089,32.004 h0.4
  text "CAN_L" at 77.47,30.801 h0.4
  text "CAN_H" at 77.597,29.531 h0.4
  text "GND" at 77.216,28.321 h0.4
  text "12V" at 77.216,27.053 h0.4
  text "SCL2" at 82.82,26.953 h0.4
  text "SCL2" at 82.82,25.737 h0.4
  text "BEE-1006 PAY-IF R1.0.0" at 54.933,24.867 h0.8
  text "NC" at 82.82,24.521 h0.4
  text "GND" at 82.82,23.305 h0.4
  text "SDA2" at 82.82,22.089 h0.4
  text "Designed by: Sang Huynh" at 53.417,21.898 h0.6
  text "SDA2" at 82.82,20.873 h0.4
  text "Checked by: Bao Bui" at 52.311,20.12 h0.6
  text "Approved by: Vu Pham" at 52.584,18.342 h0.6
  text "UART_TX" at 55.68,5.531 h0.5 r90
  text "UART_RX" at 57.236,5.531 h0.5 r90
  text "RESET" at 58.875,4.531 h0.5 r90
  text "GND" at 54.208,3.531 h0.5 r90
  text "3V3" at 60.431,3.531 h0.5 r90
Top Solder:
  rectangle: 44.894,5.478 48.098,7.036

## Text inside footprints (layer, text, board x,y; h text height)
J6: Mechanical 13 "PCB edge" at 51,2.332 h0.81
U3: Top Assembly "A" at 65.397,66.546 h1.27; Top Assembly "U" at 65.397,50.546 h1.27; Top Assembly "1" at 69.85,68.871 h1.27 r90; Top Assembly "10" at 78.85,68.871 h1.27 r90; Top Overlay "A" at 65.615,66.681 h1.27; Top Overlay "U" at 65.715,50.381 h1.27; Top Overlay "1" at 69.815,68.581 h1.27 r90; Top Overlay "10" at 78.915,68.581 h1.27 r90